# Altium PCB ES1050.PcbDoc
Units mm, origin at the board's own origin, x right, y up, seen from the top; angles counter-clockwise.
Board outline 42.62 x 60.58 mm, 2 copper layers (Top Layer, Bottom Layer); 13 components, 15 nets, 78 pads, 0 vias.
Unrouted connection lines stored in the file: 1.
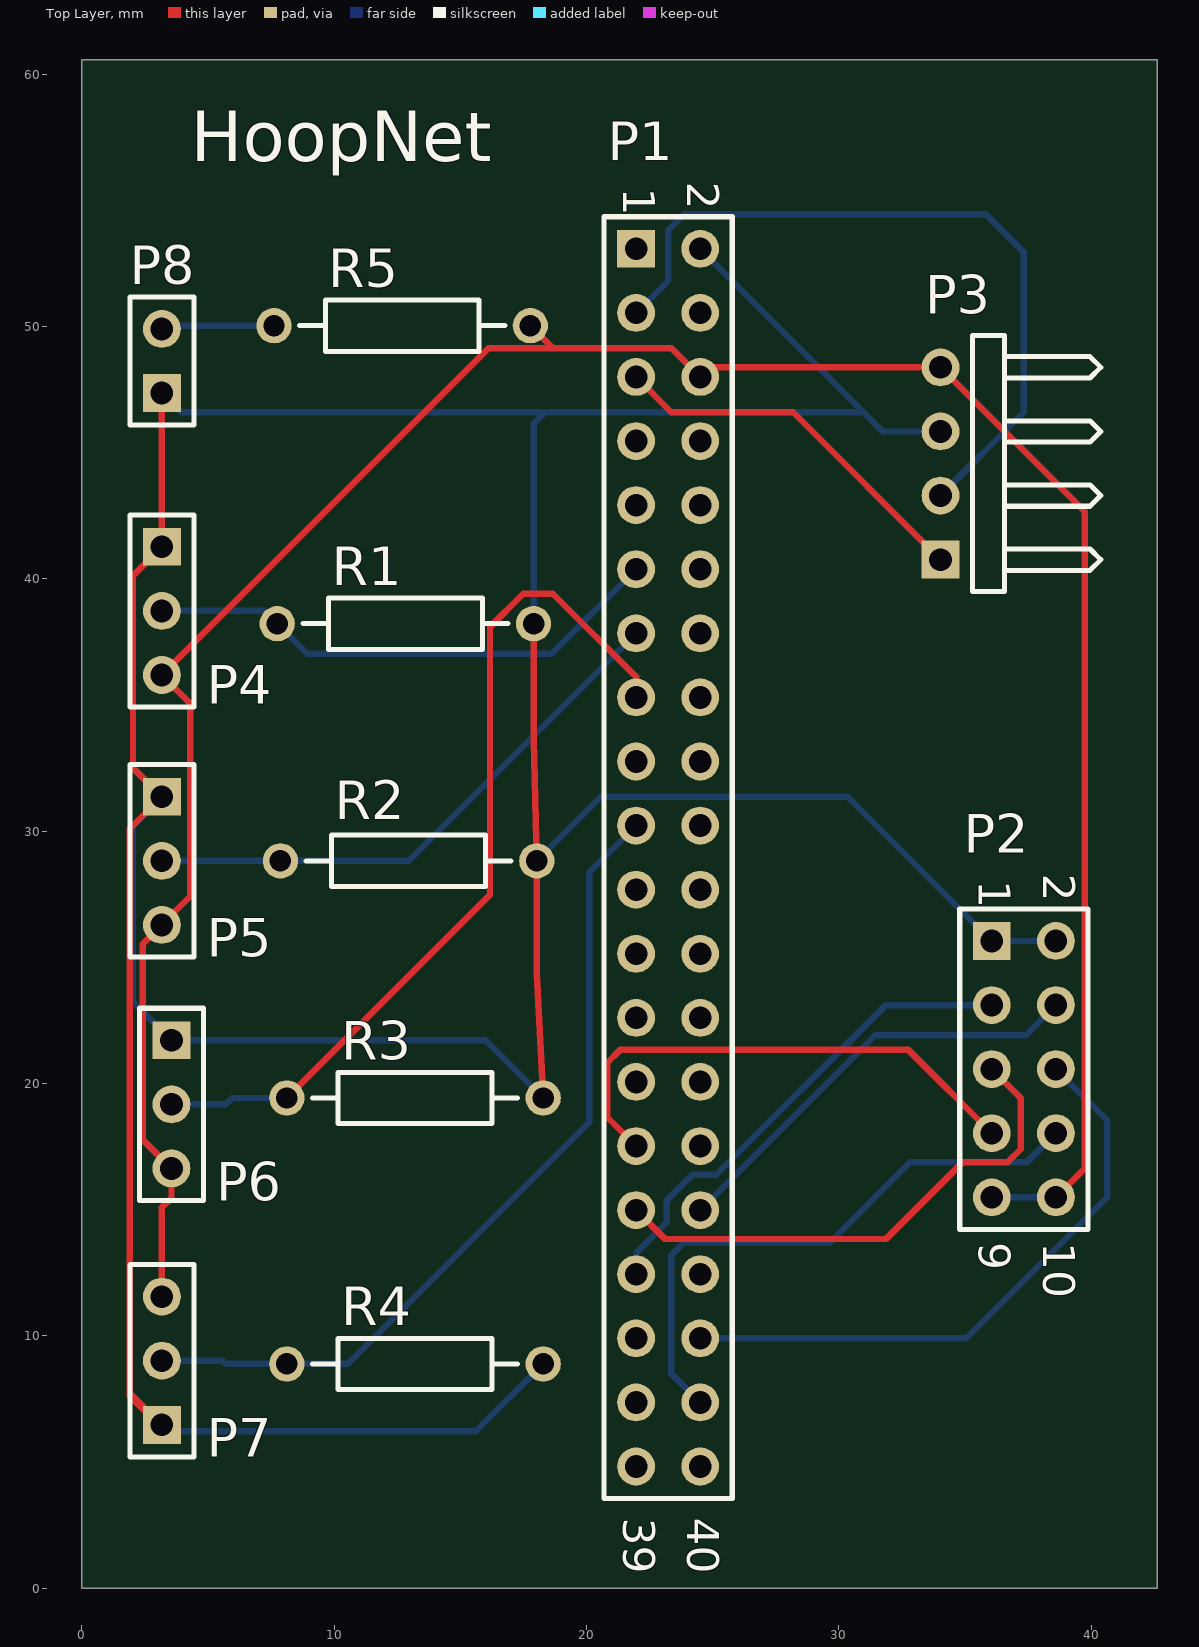
[diagram p0: Top Layer view]
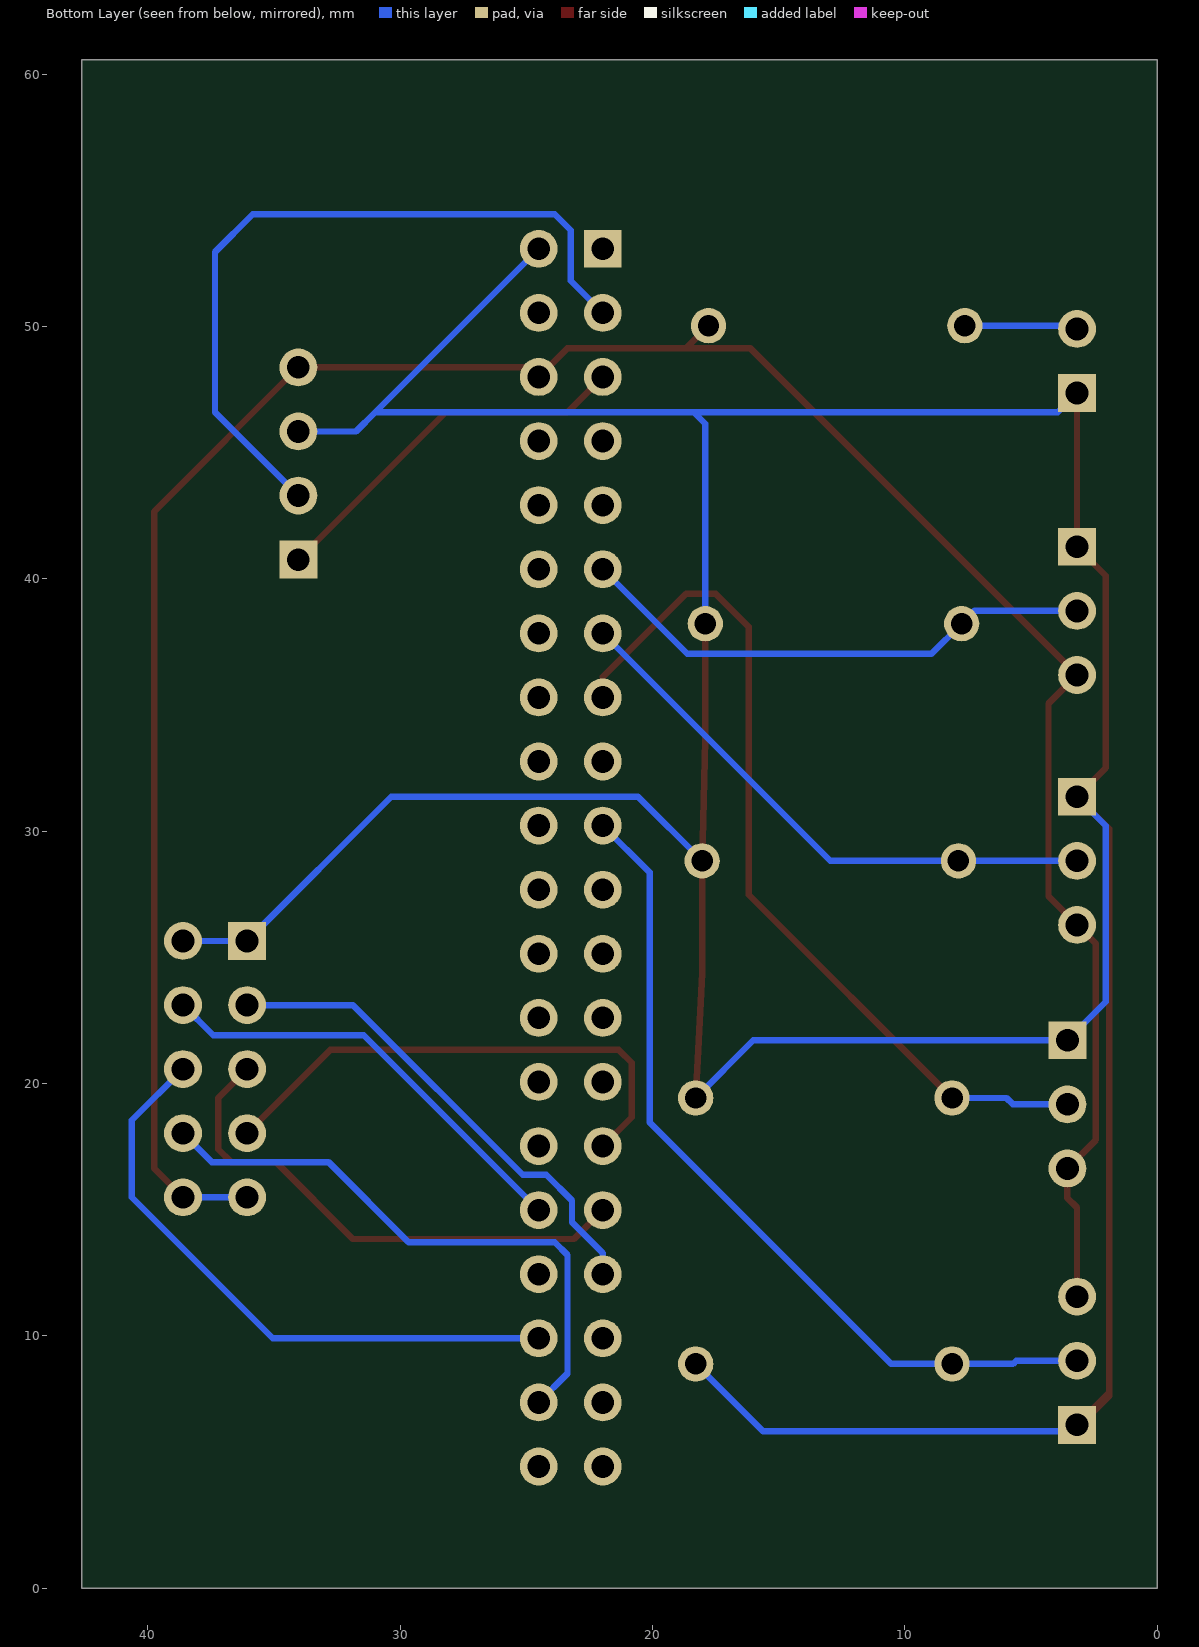
[diagram p1: Bottom Layer view, seen from below]

## Layer stack, top to bottom
Top Solder: solder mask 0.0102, Solder Resist, Dk 3.5
Top Layer: signal copper 0.0356
Dielectric 1: dielectric 0.32, FR-4, Dk 4.8
Bottom Layer: signal copper 0.0356
Bottom Solder: solder mask 0.0102, Solder Resist, Dk 3.5

## Board outline
0,0.635 0,0.889 0,60.579 42.621,60.579 42.621,0 0,0 0,0.363

## Design rules (kind name [scope] priority, off if disabled: settings)
Clearance [All] p1: gap=0.254 ignorepadtopadclearanceinfootprint=FALSE except(0: Arc-Hole Track-Hole SMDPad-Hole THPad-Hole Via-Hole Fill-Hole Poly-Hole Region-Hole Text-Hole)
PolygonConnect [All] p1: connectstyle=Relief reliefconductorwidth=0.254 reliefentries=4 polygonreliefangle="90 Angle" airgapwidth=0.254
RoomDefinition ES1050 [InComponentClass('ES1050')] p1: confinementstyle=ConfineIn formatcopy=TRUE lockcomponents=FALSE outline -26.416,-25.273 24.384,-25.273 24.384,0.127 -26.416,0.127
RoutingTopology RoutingTopology_1 [All] p1: topology=Shortest
RoutingTopology [All] p2: topology=Shortest
RoutingVias [All] p1: holewidth=0.711 width=1.27 viastyle="Through Hole" minholewidth=0.711 minwidth=1.27 maxholewidth=0.711 maxwidth=1.27
SilkToSolderMaskClearance [IsPad] p1: minsilkscreentomaskgap=0.2 clearancetoexposedcopper=TRUE
SolderMaskExpansion [All] p1: expansion=0.102 istentingtop=FALSE
Width [All] p1: maxlimit=0.254 minlimit=0.254 preferedwidth=0.254
28 further rules are at their usual default settings.

## Components (designator, comment, footprint, x,y, rotation, side; value= is the part's Value field where it differs from the comment)
P1 "Header 20X2" HDR2X20 21.971,53.086 r270 top
P2 "Header 5X2" HDR2X5 36.068,25.654 r270 top
P3 "Header 4H" HDR1X4H 34.036,40.767 r90 top
P4 "Header 3" HDR1X3 3.175,41.275 r270 top
P5 "Header 3" HDR1X3 3.175,31.369 r270 top
P6 "Header 3" HDR1X3 3.556,21.717 r270 top
P7 "Header 3" HDR1X3 3.175,6.477 r90 top
P8 "Header 2" HDR1X2 3.175,47.371 r90 top
R1 "Res2" AXIAL-0.4 12.827,38.227 r180 top value=10K
R2 "Res2" AXIAL-0.4 12.954,28.829 r180 top value=10K
R3 "Res2" AXIAL-0.4 13.208,19.431 r180 top value=10K
R4 "Res2" AXIAL-0.4 13.208,8.89 r180 top value=10K
R5 "Res2" AXIAL-0.4 12.7,50.038 r180 top value=10k

## Footprints (in the part's own frame and the unit in brackets; to place one, negate y for a bottom-side part, rotate by r counter-clockwise, add the part's x,y. Pads: shape width x height; smd on the part's side, far side on the other; paste and mask are expansions set on the pad)
AXIAL-0.4 [mm] "Axial Device, Thru-Hole; 2 Leads; 0.4 in Pin Spacing"
  round 1.4 hole 0.85: 1(-5.08,0) 2(5.08,0)
  silkscreen extent -4.06,-1.02 4.06,1.02, body extent -5.88,-1.12 5.88,1.12, height 2.03
HDR1X2 [mm] "Connector; Header; 2 Position"
  rect 1.5x1.5 hole 0.9: 1(0,0)
  round 1.5 hole 0.9: 2(2.54,0)
  silkscreen extent -1.27,-1.27 3.81,1.27, body extent -1.37,-1.37 3.91,1.37
HDR1X3 [mm] "Connector; Header; 3 Position"
  rect 1.5x1.5 hole 0.9: 1(0,0)
  round 1.5 hole 0.9: 2(2.54,0) 3(5.08,0)
  silkscreen extent -1.27,-1.27 6.35,1.27, body extent -1.37,-1.37 6.45,1.37
HDR1X4H [mm] "Connector; Header; 4 Position; Right Angle"
  rect 1.5x1.5 hole 0.9: 1(0,0)
  round 1.5 hole 0.9: 2(2.54,0) 3(5.08,0) 4(7.62,0)
  silkscreen extent -1.27,-6.35 8.89,-1.27, body extent -1.37,-6.45 8.99,0.85
HDR2X5 [mm] "Connector; Header; 5x2 Position"
  rect 1.5x1.5 hole 0.9: 1(0,0)
  round 1.5 hole 0.9: 2(0,2.54) 3(2.54,0) 4(2.54,2.54) 5(5.08,0) 6(5.08,2.54) 7(7.62,0) 8(7.62,2.54) 9(10.16,0) 10(10.16,2.54)
  silkscreen extent -1.27,-1.27 11.43,3.81, body extent -1.37,-1.37 11.53,3.91
HDR2X20 [mm] "Connector; Header; 20x2 Position"
  rect 1.5x1.5 hole 0.9: 1(0,0)
  round 1.5 hole 0.9: 2(0,2.54) 3(2.54,0) 4(2.54,2.54) 5(5.08,0) 6(5.08,2.54) 7(7.62,0) 8(7.62,2.54) 9(10.16,0) 10(10.16,2.54) 11(12.7,0) 12(12.7,2.54) 13(15.24,0) 14(15.24,2.54) 15(17.78,0) 16(17.78,2.54) 17(20.32,0) 18(20.32,2.54) 19(22.86,0) 20(22.86,2.54) 21(25.4,0) 22(25.4,2.54) 23(27.94,0) 24(27.94,2.54) 25(30.48,0) 26(30.48,2.54) 27(33.02,0) 28(33.02,2.54) 29(35.56,0) 30(35.56,2.54) 31(38.1,0) 32(38.1,2.54) 33(40.64,0) 34(40.64,2.54) 35(43.18,0) 36(43.18,2.54) 37(45.72,0) 38(45.72,2.54) 39(48.26,0) 40(48.26,2.54)
  silkscreen extent -1.27,-1.27 49.53,3.81, body extent -1.37,-1.37 49.63,3.91

## Part data
P1: "Header, 20-Pin, Dual row", Supplier Part Number 1=S7123-ND, LatestRevisionDate=17-Jul-2002, LatestRevisionNote="Re-released for DXP Platform.", Publisher="Altium Limited", Supplier 1=Digi-Key
P2: "Header, 5-Pin, Dual row", Supplier Part Number 1=S7108-ND, LatestRevisionDate=17-Jul-2002, LatestRevisionNote="Re-released for DXP Platform.", Publisher="Altium Limited", Supplier 1=Digi-Key
P3: "Header, 4-Pin, Right Angle", Supplier Part Number 1=S5440-ND, LatestRevisionDate=17-Jul-2002, LatestRevisionNote="Re-released for DXP Platform.", Publisher="Altium Limited", Supplier 1=Digi-Key
P4: "Header, 3-Pin", LatestRevisionDate=17-Jul-2002, LatestRevisionNote="Re-released for DXP Platform.", Publisher="Altium Limited"
P5 P6 P7: "Header, 3-Pin", Supplier Part Number 1=S7036-ND, LatestRevisionDate=17-Jul-2002, LatestRevisionNote="Re-released for DXP Platform.", Publisher="Altium Limited", Supplier 1=Digi-Key
P8: "Header, 2-Pin", Supplier Part Number 1=S7000-ND, LatestRevisionDate=17-Jul-2002, LatestRevisionNote="Re-released for DXP Platform.", Publisher="Altium Limited", Supplier 1=Digi-Key
R1 R2 R3 R4: "Resistor", Supplier Part Number 1=A105970CT-ND, LatestRevisionDate=17-Jul-2002, LatestRevisionNote="Re-released for DXP Platform.", PackageDescription="Axial Device, Thru-Hole; 2 Leads; 0.4 in Pin Spacing", PackageReference=AXIAL-0.4, Published=8-Jun-2000, Publisher="Altium Limited", Supplier 1=Digi-Key
R5: library part Res1, "Resistor", Supplier Part Number 1=ALSR3J-450-ND, LatestRevisionDate=17-Jul-2002, LatestRevisionNote="Re-released for DXP Platform.", PackageDescription="Axial Device, Thru-Hole; 2 Leads; 0.3 in Pin Spacing", PackageReference=AXIAL-0.3, Published=8-Jun-2000, Publisher="Altium Limited", Supplier 1=Digi-Key

## Nets (pads, with @x,y where several pads share a name; then routed paths per layer and width w, separated by ;. In a path a pad name is that pad's centre, name@x,y a point inside that pad or via, vN(x,y) a via of type N, cw(c..) or ccw(c..) an arc to the next point about the centre after c; other vN are vias at no path point)
GND: P1.6 P2.9 P2.10 P3.4 P4.3 P5.3 P6.3 P7.3 R5.1 | length 103.1
  Top Layer w0.254: P7.3 3.175,15.088 3.556,15.469 P6.3 2.425,17.768 2.425,25.539 P5.3 4.306,27.42 4.306,35.064 P4.3 16.117,49.137 18.681,49.137 ; R5.1 18.681,49.137 ; P2.10 39.751,16.637 39.751,42.672 P3.4 24.511,48.387 P1.6 23.38,49.137 18.681,49.137
  Bottom Layer w0.254: P2.9 P2.10
NetP1_3: P1.3 P3.2 | length 29.8
  Bottom Layer w0.254: P1.3 23.241,51.816 23.241,53.823 23.876,54.458 35.839,54.458 37.338,52.959 37.338,46.609 P3.2
NetP1_5: P1.5 P3.1 | length 15.1
  Top Layer w0.254: P1.5 23.368,46.609 28.194,46.609 P3.1
NetP1_7: P1.7 P8.2 R5.2 | length 4.5
  Bottom Layer w0.254: P8.2 3.302,50.038 R5.2
NetP1_11: P1.11 P4.2 R1.2 | length 20.9
  Bottom Layer w0.254: P4.2 7.239,38.735 R1.2 8.941,37.033 18.618,37.033 P1.11
NetP1_13: P1.13 P5.2 R2.2 | length 22.5
  Bottom Layer w0.254: P5.2 R2.2 12.954,28.829 P1.13
NetP1_15: P1.15 P6.2 R3.2 | length 35.2
  Top Layer w0.254: R3.2 16.18,27.483 16.18,38.1 17.501,39.421 18.669,39.421 21.971,36.119 P1.15
  Bottom Layer w0.254: P6.2 5.715,19.177 5.969,19.431 R3.2
NetP1_19: P1.19 P7.2 R4.2 | length 33.5
  Bottom Layer w0.254: P7.2 5.588,9.017 5.715,8.89 R4.2 10.541,8.89 20.117,18.466 20.117,28.372 P1.19
NetP1_29: P1.29 P2.7 | length 20.6
  Top Layer w0.254: P1.29 20.828,18.669 20.828,20.828 21.336,21.336 32.766,21.336 P2.7
NetP1_31: P1.31 P2.5 | length 20.8
  Top Layer w0.254: P1.31 23.114,13.843 31.877,13.843 34.925,16.891 36.703,16.891 37.211,17.399 37.211,19.431 P2.5
NetP1_32: P1.32 P2.4 | length 17.5
  Bottom Layer w0.254: P1.32 31.445,21.92 37.414,21.92 P2.4
NetP1_33: P1.33 P2.3 | length 19.5
  Bottom Layer w0.254: P1.33 21.971,13.284 23.19,14.503 23.19,15.367 24.206,16.383 25.146,16.383 31.877,23.114 P2.3
NetP1_36: P1.36 P2.6 | length 24.4
  Bottom Layer w0.254: P1.36 35.052,9.906 40.64,15.494 40.64,18.542 P2.6
NetP1_38: P1.38 P2.8 | length 23.6
  Bottom Layer w0.254: P1.38 23.368,8.509 23.368,13.208 23.876,13.716 29.667,13.716 32.842,16.891 37.465,16.891 P2.8
VCC: P1.2 P2.1 P2.2 P3.3 P4.1 P5.1 P6.1 P7.1 P8.1 R1.1 R2.1 R3.1 R4.1 | length 179.5
  Top Layer w0.254: P7.1 1.905,7.747 ; P8.1 P4.1 2.032,40.132 2.032,32.512 P5.1 1.905,30.099 1.905,7.747 ; P7.1@3.302,6.223 1.905,7.62 1.905,7.747 ; R1.1 17.907,33.655 R2.1 18.034,24.384 R3.1
  Bottom Layer w0.254: P5.1 2.032,30.226 2.032,23.241 P6.1 16.002,21.717 R3.1 ; P8.1 3.937,46.609 18.364,46.609 ; P7.1@3.302,6.223 15.621,6.223 R4.1 ; R1.1 17.907,46.152 18.364,46.609 ; R2.1 20.574,31.369 30.353,31.369 P2.1 P2.2 ; P1.2 30.988,46.609 ; P3.3 31.75,45.847 30.988,46.609 ; 18.364,46.609 30.988,46.609
pads on no net: P1.1 P1.4 P1.8 P1.9 P1.10 P1.12 P1.14 P1.16 P1.17 P1.18 P1.20 P1.21 P1.22 P1.23 P1.24 P1.25 P1.26 P1.27 P1.28 P1.30 P1.34 P1.35 P1.37 P1.39 P1.40

## Silkscreen, mask and mechanical layers (free items; w line width, h text height)
Top Overlay:
  text "HoopNet" at 4.318,56.546 h2

## Text inside footprints (layer, text, board x,y; h text height)
P1: Top Overlay "1" at 21.463,55.499 h1.27 r270; Top Overlay "2" at 24.003,55.753 h1.27 r270; Top Overlay "40" at 24.003,2.794 h1.27 r270; Top Overlay "39" at 21.463,2.794 h1.27 r270
P2: Top Overlay "9" at 35.56,13.716 h1.27 r270; Top Overlay "10" at 38.1,13.716 h1.27 r270; Top Overlay "1" at 35.56,28.067 h1.27 r270; Top Overlay "2" at 38.1,28.321 h1.27 r270